# Altium PCB LEDboard.PcbDoc
Units mm, origin at the board's own origin, x right, y up, seen from the top; angles counter-clockwise.
Board outline 20 x 20 mm, 2 copper layers (Top Layer, Bottom Layer), stack 1.595 mm thick; 5 components, 4 nets, 10 pads, 2 vias.
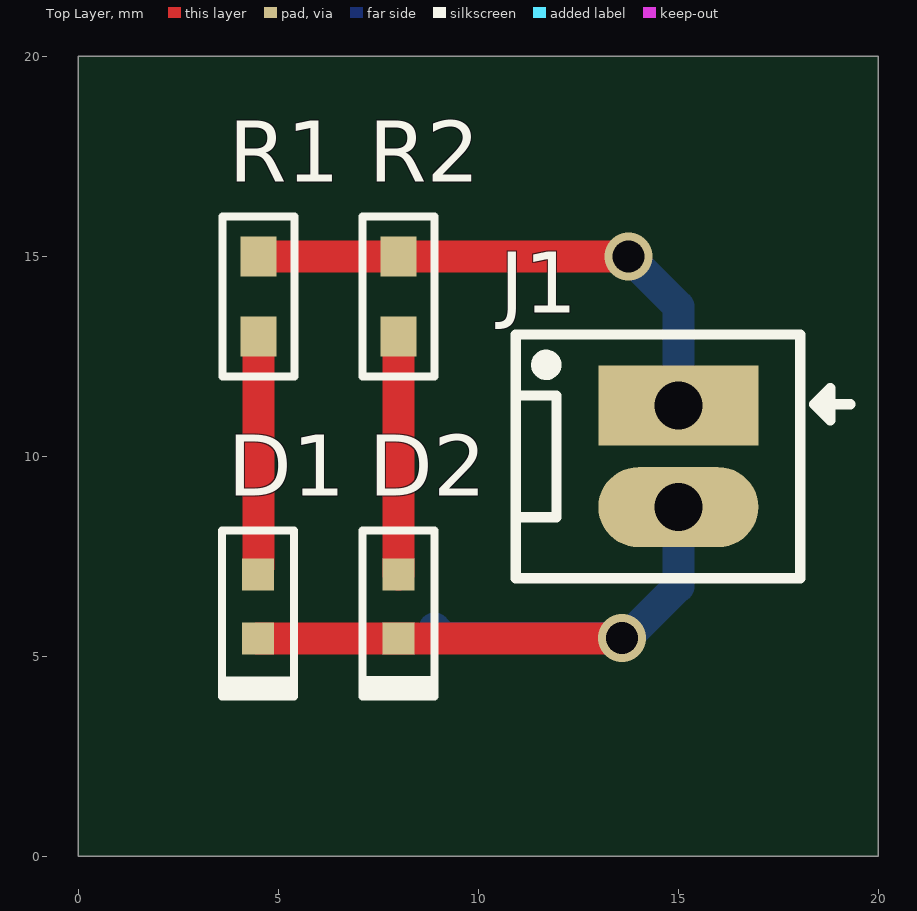
[diagram p0: Top Layer view]
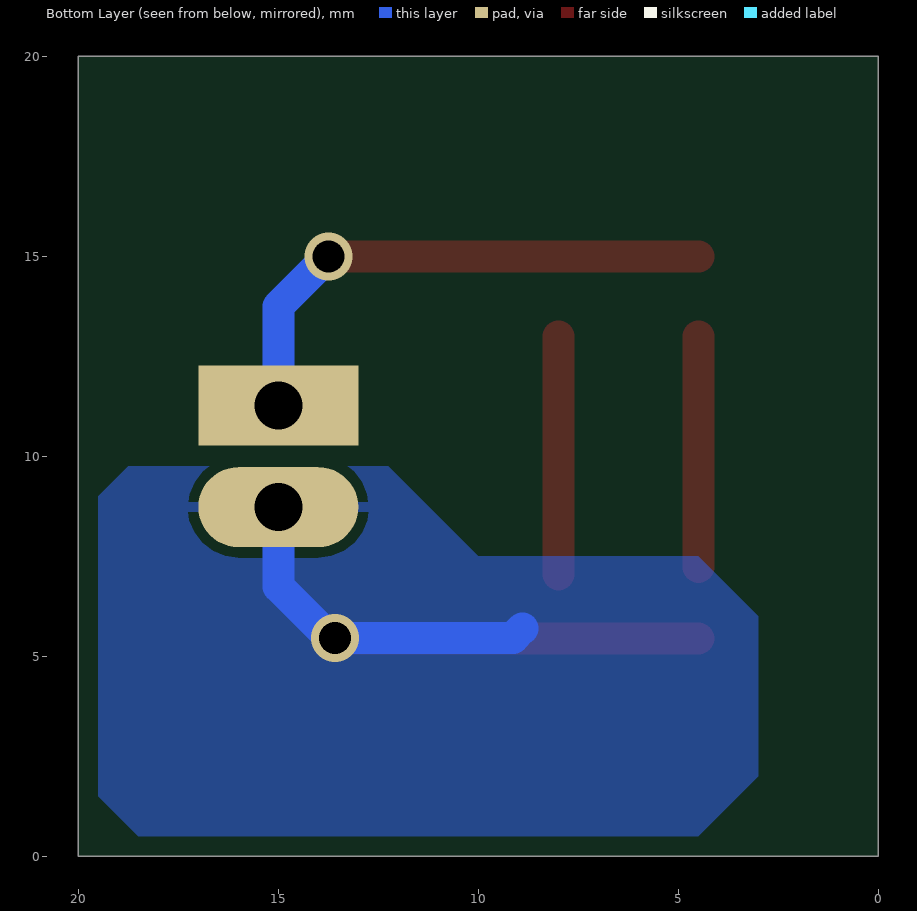
[diagram p1: Bottom Layer view, seen from below]
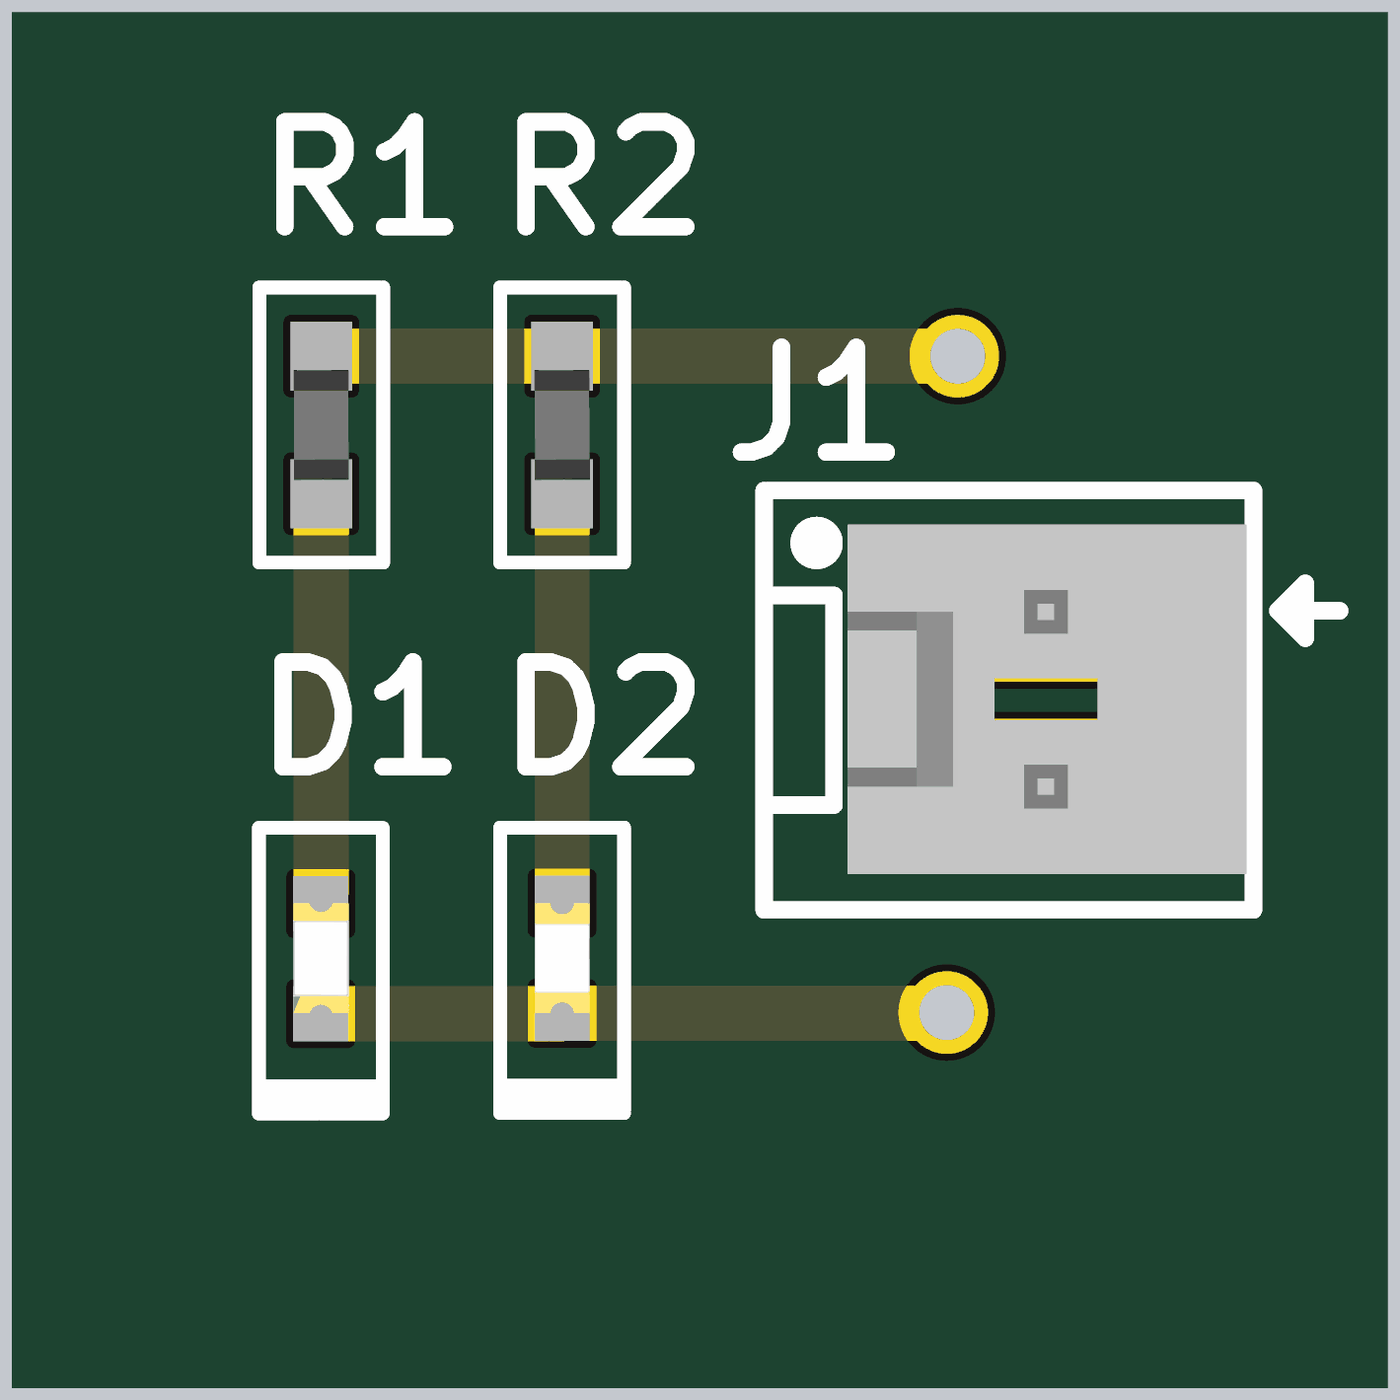
[diagram p2: 3D render of the assembled board from above, using the file's embedded part models]

## Layer stack, top to bottom
Top Solder: solder mask 0.0102, Solder Resist, Dk 3.5
Top Layer: signal copper 0.0356
Dielectric 1: dielectric 1.524, FR-4, Dk 4.8
Bottom Layer: signal copper 0.0356
Bottom Solder: solder mask 0.0102, Solder Resist, Dk 3.5

## Board outline
0,0 0,20 20,20 20,0

## Design rules (kind name [scope] priority, off if disabled: settings)
Clearance [All] p1: gap=0.3 ignorepadtopadclearanceinfootprint=FALSE except(0: Via-Text)
PolygonConnect [All] p1: thpad.connectstyle=Relief thpad.reliefconductorwidth=0.254 thpad.reliefentries=4 thpad.polygonreliefangle="90 Angle" thpad.airgapwidth=0.254 smdpad.connectstyle=Relief smdpad.reliefconductorwidth=0.254 smdpad.reliefentries=4 smdpad.polygonreliefangle="90 Angle" smdpad.airgapwidth=0.254 via.connectstyle=Direct via.reliefconductorwidth=0.254 via.reliefentries=4 via.polygonreliefangle="90 Angle" via.airgapwidth=0.254
RoutingVias [All] p1: holewidth=0.8 width=1.2 viastyle="Through Hole" minholewidth=0.3 minwidth=0.6 maxholewidth=1.5 maxwidth=3
SolderMaskExpansion [All] p1: expansion=0.102 istentingtop=FALSE
Width [All] p1: maxlimit=1.5 minlimit=0.3 preferedwidth=0.8
30 further rules are at their usual default settings.

## Components (designator, comment, footprint, x,y, rotation, side; value= is the part's Value field where it differs from the comment)
D1 "Red LED" DIODE_RED 4.597,6.172 r90 top
D2 "Green LED" DIODE_GREEN 8,6.25 r90 top
J1 "1x2 Header" HEADER_2PIN 15,10 r0 top
R1 "68R" R68 4.5,14 r270 top
R2 "68R" R68 8,14 r270 top

## Footprints (in the part's own frame and the unit in brackets; to place one, negate y for a bottom-side part, rotate by r counter-clockwise, add the part's x,y. Pads: shape width x height; smd on the part's side, far side on the other; paste and mask are expansions set on the pad)
DIODE_GREEN [mm]
  rect 0.8x0.8 smd: 1(-0.8,0) 2(0.8,0)
  silkscreen extent -2.25,-0.9 1.9,0.9, body extent -0.8,-0.4 0.8,0.4, height 0.4
DIODE_RED [mm]
  rect 0.8x0.8 smd: 1(-0.728,0.105) 2(0.872,0.105)
  silkscreen extent -2.18,-0.79 1.97,1.01, body extent -0.72,-0.3 0.88,0.5, height 0.7
HEADER_2PIN [mm]
  rect 4x2 hole 1.2: 1(0,1.27)
  oval 4x2 hole 1.2: 2(0,-1.27)
  silkscreen extent -4.06,-3.05 4.3,3.05, body extent -2.85,-2.52 2.95,2.56, height 11.71
R68 [mm]
  rect 1x0.9 smd: 1(-1,0) 2(1,0)
  silkscreen extent -2,-0.9 2,0.9, body extent -0.8,-0.4 0.8,0.4, height 0.46

## Part data
D1: library part 150060RS75000, "LED Low-Power Uni-Color Red 630nm 2V 2-Pin Chip 0603(1608Metric) T/R", Case Code (Imperial)=0603, Case Code (Metric)=1608, Color=Red, Forward Current=30mA, Forward Voltage=2V, Lens Color=Colorless, Manufacturer="Wurth Electronics", Max Operating Temperature=85°C, Max Reverse Voltage (DC)=5V, Min Operating Temperature=-40°C, Package Quantity=1, Power Dissipation=72mW, Supplier Part Number 1=732-4978-1-ND, Test Current=20mA, Case/Package=0603, Category=LEDs, ComponentLink1Description=https://datasheet.ciiva.com/29563/150060rs75000-29563040.pdf?src-supplier=Digikey, ComponentLink1URL=https://datasheet.ciiva.com/29563/150060rs75000-29563040.pdf?src-supplier=Digikey, Dominant Wavelength=625nm, Height=0.8mm, Length=1.6mm, Lens Size=0.7mm, Lens Style=Clear,Flat,Rectangular, Lens Transparency=Clear, Luminous Intensity=250mcd, Manufacturer Part Number=150060RS75000, Mount="Surface Mount", Packaging="Cut Tape", Pricing 1="1=0,15, 50=0,142, 100=0,122, 500=0,105, 1000=0,10125 (USD)", Reach SVHC Compliant=Unknown, Reverse Voltage=5V, RoHS=Yes, RoHS Compliant=Yes, Series=WL-SMCW, Stock 1=116083, Supplier 1=Digikey, Viewing Angle=140°, Wavelength=625nm, Width=0.8mm
D2: library part 150060VS55040, "WL-SMCD SMT Mono-color Chip LED Diffused", Case Code (Imperial)=0603, Case Code (Metric)=1608, Color=Green, Forward Current=40mA, Forward Voltage=2V, Manufacturer="Wurth Electronics", Max Operating Temperature=85°C, Max Reverse Voltage (DC)=5V, Min Operating Temperature=-40°C, Power Dissipation=48mW, Supplier Part Number 1=732-12017-1-ND, Test Current=20mA, Case/Package=0603, Category=LEDs, ComponentLink1Description=http://www.farnell.com/datasheets/2621647.pdf?src-supplier=Farnell, ComponentLink1URL=http://www.farnell.com/datasheets/2621647.pdf?src-supplier=Farnell, ComponentLink2Description=https://www.we-online.de/web/en/index.php/download/media/07_electronic_components/download_center_1/application_notes_berichte/ano002_leds___the_future_of_horticultural_lighting/ANO002b_EN_LEDs_The_Future_of_Horticultural_Lighting.pdf?src-supplier=Digikey, ComponentLink2URL=https://www.we-online.de/web/en/index.php/download/media/07_electronic_components/download_center_1/application_notes_berichte/ano002_leds___the_future_of_horticultural_lighting/ANO002b_EN_LEDs_The_Future_of_Horticultural_Lighting.pdf?src-supplier=Digikey, ComponentLink3Description=https://katalog.we-online.de/pbs/datasheet/150060VS55040.pdf?src-supplier=Digikey, ComponentLink3URL=https://katalog.we-online.de/pbs/datasheet/150060VS55040.pdf?src-supplier=Digikey, ComponentLink4Description=http://www.farnell.com/datasheets/2621647.pdf?src-supplier=Element14, ComponentLink4URL=http://www.farnell.com/datasheets/2621647.pdf?src-supplier=Element14, ComponentLink5Description=http://www.farnell.com/datasheets/2621647.pdf?src-supplier=Newark, ComponentLink5URL=http://www.farnell.com/datasheets/2621647.pdf?src-supplier=Newark, Dominant Wavelength=573nm, Height=0.5mm, Length=1.6mm, Lens Size=0.8mm, Lens Style=Flat, Lens Transparency=Diffused, Luminous Intensity=60mcd, Manufacturer Part Number=150060VS55040, Mount="Surface Mount", Packaging="Cut Tape", Pricing 1="1=0,19, 10=0,173, 100=0,157, 500=0,141, 1000=0,125 (USD)", Reverse Voltage=5V, RoHS=Yes, RoHS Compliant=Yes, Series=WL-SMDC, Stock 1=10387, Supplier 1=Digikey, Viewing Angle=140°, Wavelength=573nm, Width=0.8mm
J1: library part 22-29-2021, "KK 254 Wire-to-Board Header, Vertical, with Friction Lock, 2 Circuits, Gold (Au) Plating", Color=White, Flammability Rating="UL94 V-0", Housing Color=Natural, Manufacturer=Molex, Package Quantity=24000, Supplier Part Number 1=WM2744-ND, Voltage Rating (DC)=250V, Category="Headers and Wire Housings", Contact Material=Tin, Contact Plating=Gold, Contact Type=-, Gender=Male, Glow Wire Compliant=Non-compliant, Halogen Free="Low Halogen", Lead Free="Lead Free", Manufacturer Part Number=22-29-2021, Number of Positions=2, Number of Rows=1, Packaging=Bulk, Plating=Tin, Pricing 1="1=0,34, 10=0,286, 100=0,2225, 3000=0,18654 (USD)", Reach SVHC Compliant=Unknown, RoHS=Yes, RoHS Compliant=Yes, Series=6410, Stock 1=124448, Supplier 1=Digikey, Termination="Through Hole"
R1 R2: library part CRCW080568R0FKEAC, "SMD Chip Resistor, 68 Ohm, ± 1%, 125 mW, 0805 [2012 Metric], Thick Film, General Purpose", Manufacturer=Vishay, Supplier Part Number 1=541-CRCW080568R0FKEACCT-ND, Category="Chip SMD Resistors", Manufacturer Part Number=CRCW080568R0FKEAC, Pricing 1="1=0,1, 10=0,036, 50=0,0234, 100=0,0197, 500=0,01372, 1000=0,01194 (USD)", RoHS=Yes, RoHS Compliant=Yes, Stock 1=117217, Supplier 1=Digikey

## Via types
v1: diameter 1.2, hole 0.8, Top Layer to Bottom Layer, 2 vias

## Nets (pads, with @x,y where several pads share a name; then routed paths per layer and width w, separated by ;. In a path a pad name is that pad's centre, name@x,y a point inside that pad or via, vN(x,y) a via of type N, cw(c..) or ccw(c..) an arc to the next point about the centre after c; other vN are vias at no path point)
+3.3V: J1.1 R1.1 R2.1 | length 13.5
  Top Layer w0.8: R1.1 R2.1 v1(13.75,15)
  Bottom Layer w0.8: v1(13.75,15) 15,13.75 J1.1
"Anode G": D2.2 R2.2 | length 5.9
  Top Layer w0.8: D2.2 R2.2
"Anode R": D1.2 R1.2 | length 5.8
  Top Layer w0.8: D1.2@4.5,7.227 R1.2
GND: D1.1 D2.1 J1.2 | length 17.8
  Top Layer w0.8: D1.1 7.994,5.444 D2.1 13.578,5.45 v1(13.589,5.461)
  Bottom Layer w0.8: 8.9,5.7 9.139,5.461 v1(13.589,5.461) 13.666,5.538 13.788,5.538 15,6.75 J1.2

## Polygon pours and split planes (outlines as drawn)
GND on Bottom Layer "-out" (solid, pour order 0): 12.25,9.75 10,7.5 4.5,7.5 3,6 3,2 4.5,0.5 18.5,0.5 19.5,1.5 19.5,9 18.75,9.75

## Silkscreen, mask and mechanical layers (free items; w line width, h text height)
Board Outline:
  the board outline again, w0.254